# Altium PCB PCB_Analog_2021-08-04.pcbdoc
Units mil, origin at the board's own origin, x right, y up, seen from the top; angles counter-clockwise.
Board outline 5031.09 x 3931.04 mil, 2 copper layers (Top Layer, Bottom Layer); 71 components, 52 nets, 222 pads, 13 vias.
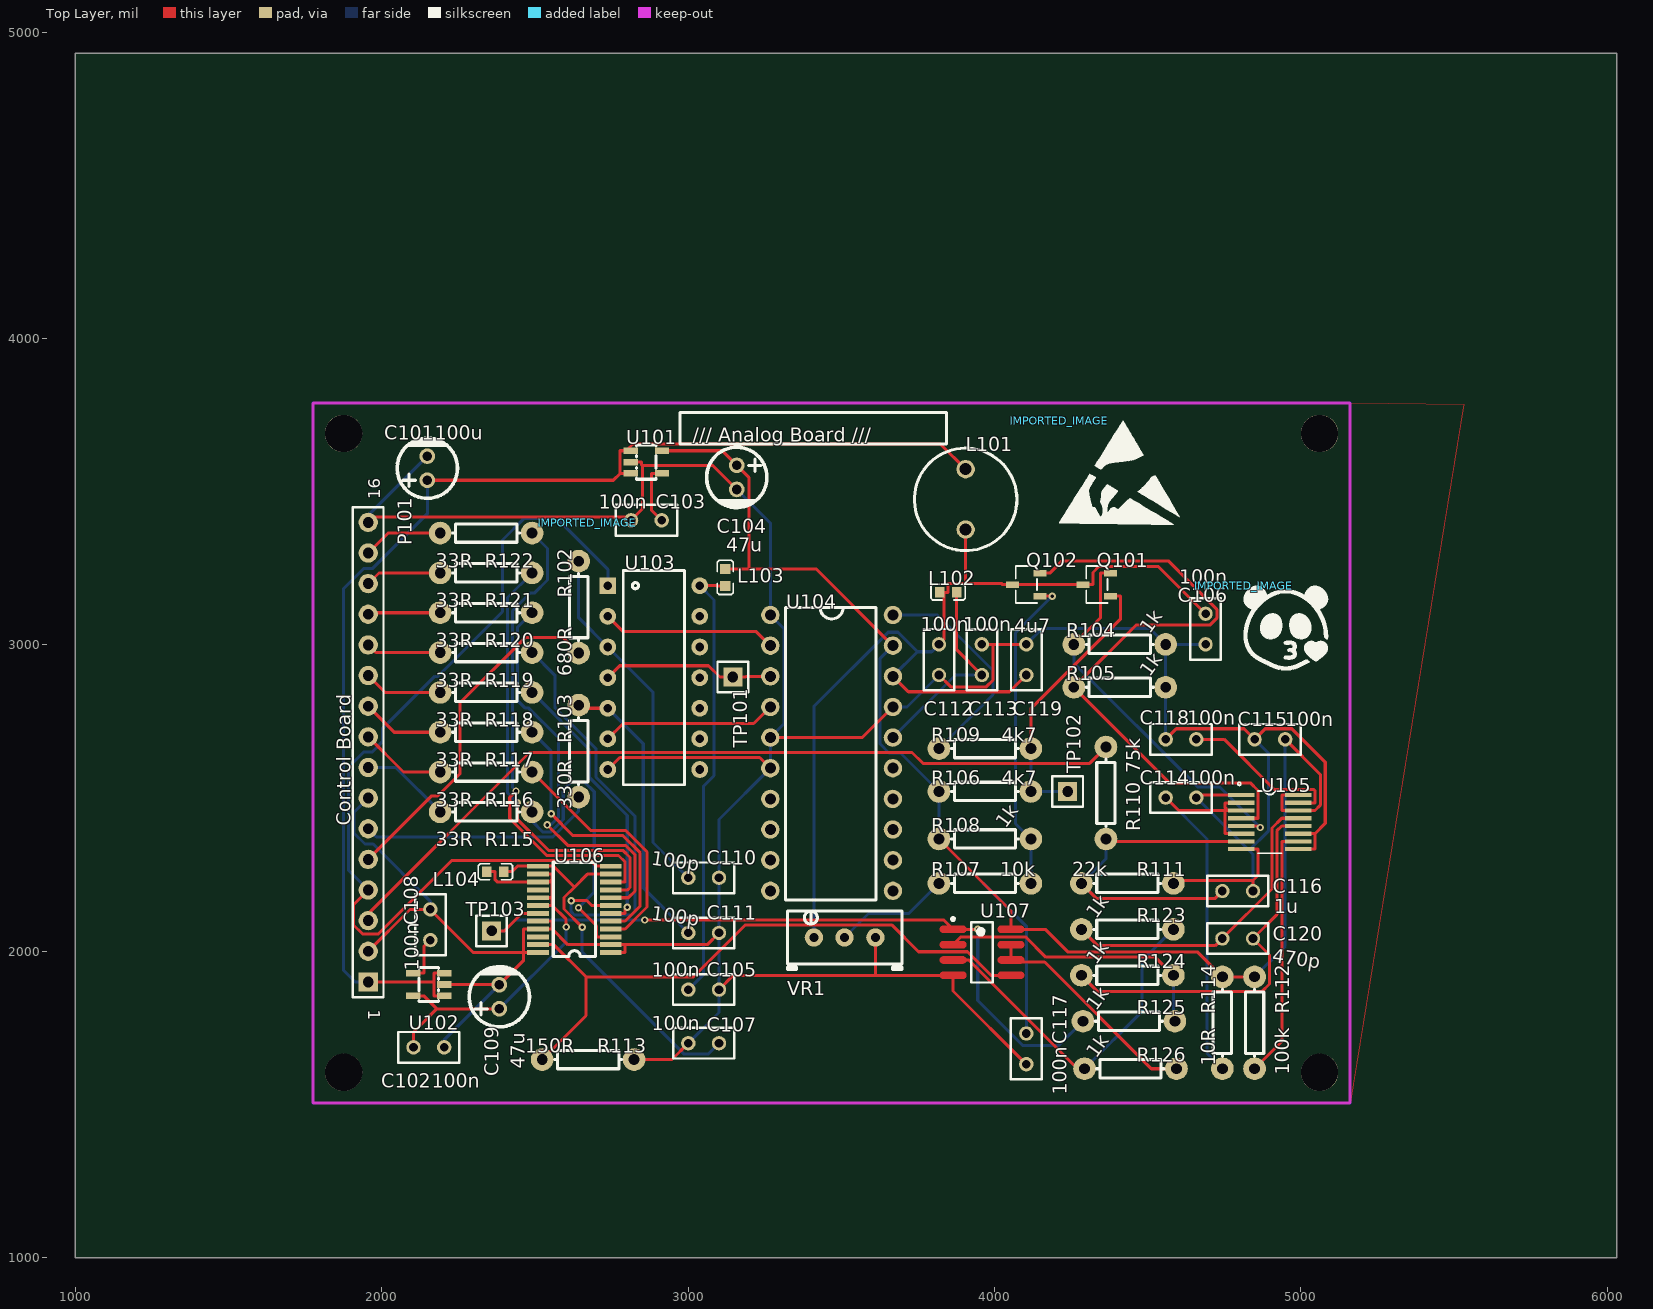
[diagram p0: Top Layer view]
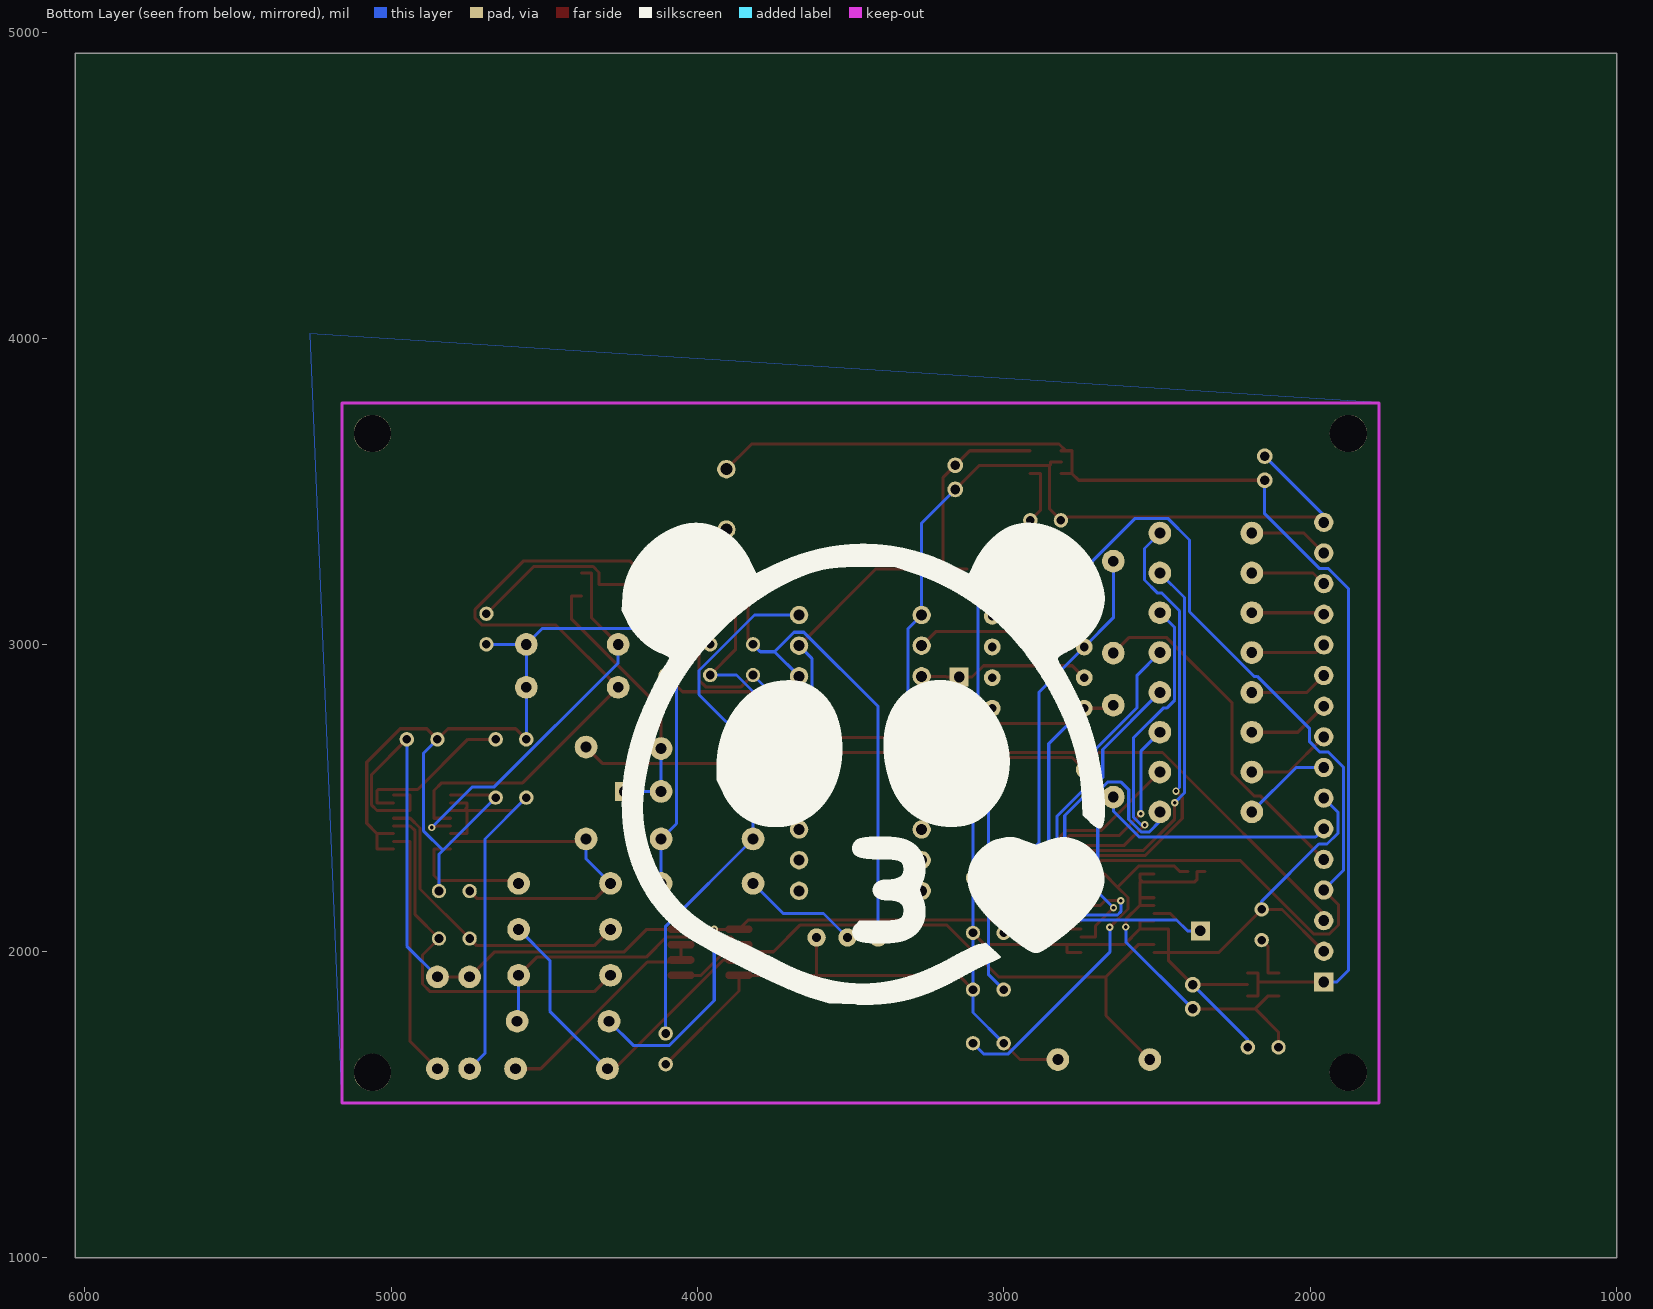
[diagram p1: Bottom Layer view, seen from below]

## Layer stack, top to bottom
Top Layer: signal copper (thickness not stored)
Dielectric: dielectric 12.6, FR-4, Dk 4.8
Bottom Layer: signal copper (thickness not stored)

## Board outline
6031.09,1000 1000,1000 1000,4931.04 6031.09,4931.04

## Components (designator, comment, footprint, x,y, rotation, side; value= is the part's Value field where it differs from the comment)
C101 "100u" CAP-TH_BD5.0-P2.00-D0.8-FD 2149,3576.73 r90 top
C102 "100n" RAD-0.1 2154,1686.73 r0 top
C103 "100n" RAD-0.1 2864,3406.73 r180 top
C104 "47u" CAP-TH_BD5.0-P2.00-D0.8-FD 3159,3546.73 r270 top
C105 "100n" RAD-0.1 3051.09,1875 r0 top
C106 "100n" RAD-0.1 4689,3051.73 r270 top
C107 "100n" RAD-0.1 3051.09,1700 r180 top
C108 "100n" RAD-0.1 2159,2086.73 r90 top
C109 "47u" CAP-TH_BD5.0-P2.00-D0.8-FD 2384,1851.73 r90 top
C110 "100p" RAD-0.1 3051.09,2240 r0 top
C111 "100p" RAD-0.1 3051.09,2060 r0 top
C112 "100n" RAD-0.1 3819,2951.73 r270 top
C113 "100n" RAD-0.1 3959,2951.73 r90 top
C114 "100n" RAD-0.1 4609,2501.73 r0 top
C115 "100n" RAD-0.1 4899,2691.73 r180 top
C116 "1u" RAD-0.1 4794,2196.73 r0 top
C117 "100n" RAD-0.1 4104,1681.73 r270 top
C118 "100n" RAD-0.1 4609,2691.73 r180 top
C119 "4u7" RAD-0.1 4104,2951.73 r90 top
C120 "470p" RAD-0.1 4794,2041.73 r180 top
IMPORTED_IMAGE "IMPORTED_IMAGE" IMPORTED_IMAGE 2670.99,3398.02 r0 top
IMPORTED_IMAGE "IMPORTED_IMAGE" IMPORTED_IMAGE 4813.3,3192.67 r0 top
IMPORTED_IMAGE "IMPORTED_IMAGE" IMPORTED_IMAGE 4211.4,3731.76 r0 top
L101 "100uH" IND-TH_BD8.5-P5.00-D0.6 3906.09,3475 r90 top
L102 "FB" L0603 3849,3171.73 r0 top
L103 "FB" L0603 3121.09,3220 r270 top
L104 "FB" L0603 2371.09,2260 r180 top
P101 "Control Board" HDR-TH_16P-P2.54-V 1956.09,2650 r90 top
Q101 "2SC2712" SOT-23-3_L2.9-W1.6-P1.90-LS2.8-BR 4334,3196.73 r0 top
Q102 "2SC2712" SOT-23-3_L2.9-W1.6-P1.90-LS2.8-BR 4104,3196.73 r0 top
R102 "680R" R_AXIAL-0.3 2643.17,3123.27 r270 top
R103 "330R" R_AXIAL-0.3 2643.17,2653.27 r270 top
R104 "1k" R_AXIAL-0.3 4409,3001.73 r0 top
R105 "1k" R_AXIAL-0.3 4409,2861.73 r0 top
R106 "4k7" R_AXIAL-0.3 3969,2521.73 r0 top
R107 "10k" R_AXIAL-0.3 3969,2221.73 r180 top
R108 "1k" R_AXIAL-0.3 3969,2366.73 r0 top
R109 "4k7" R_AXIAL-0.3 3969,2661.73 r0 top
R110 "75k" R_AXIAL-0.3 4364,2516.73 r270 top
R111 "22k" R_AXIAL-0.3 4434,2221.73 r0 top
R112 "100k" R_AXIAL-0.3 4849,1766.73 r270 top
R113 "150R" R_AXIAL-0.3 2674,1646.73 r0 top
R114 "10R" R_AXIAL-0.3 4744,1766.73 r270 top
R115 "33R" R_AXIAL-0.3 2341.09,2455 r180 top
R116 "33R" R_AXIAL-0.3 2341.09,2585 r180 top
R117 "33R" R_AXIAL-0.3 2341.09,2715 r180 top
R118 "33R" R_AXIAL-0.3 2341.09,2845 r180 top
R119 "33R" R_AXIAL-0.3 2341.09,2975 r180 top
R120 "33R" R_AXIAL-0.3 2341.09,3105 r180 top
R121 "33R" R_AXIAL-0.3 2341.09,3235 r180 top
R122 "33R" R_AXIAL-0.3 2341.09,3365 r180 top
R123 "1k" R_AXIAL-0.3 4434,2071.73 r0 top
R124 "1k" R_AXIAL-0.3 4434,1921.73 r0 top
R125 "1k" R_AXIAL-0.3 4439,1771.73 r180 top
R126 "1k" R_AXIAL-0.3 4444,1616.73 r0 top
TP101 "HDR-M-2.54_1x1" HDR-M-2.54_1X1 3146.09,2895 r0 top
TP102 "HDR-M-2.54_1x1" HDR-M-2.54_1X1 4239,2521.73 r0 top
TP103 "HDR-M-2.54_1x1" HDR-M-2.54_1X1 2359,2066.73 r0 top
U101 "TAR5SB50" SOT23-5 2864,3596.73 r270 top
U102 "TAR5SB33" SOT23-5 2154,1891.73 r90 top
U103 "SN74AHCT04N" DIP14 2888.17,2893.27 r270 top
U104 "TCD132D" WDIP20-G-400(B) 3468.61,2647.52 r0 top
U105 "AD8330ARQ" AD8330-RQ_16 4899,2421.73 r0 top
U106 "ADC1173CIMTC" TSSOP-24 2629,2136.73 r180 top
U107 "AD8656" ADI-R-8_N 4054,1921.73 r0 top
VR1 "10k" RES-ADJ-TH_3296W 3511.09,2045 r90 top
? "" ? 1826.1,3934.07 r0 top
? "" ? 3468.59,3871.27 r0 top
? "" ? 1698.74,2647.5 r0 top
? "" ? 1866.1,3714.52 r0 top
? "" ? 3468.65,3081.58 r0 top

## Footprints (in the part's own frame and the unit in brackets; to place one, negate y for a bottom-side part, rotate by r counter-clockwise, add the part's x,y. Pads: shape width x height; smd on the part's side, far side on the other; paste and mask are expansions set on the pad)
AD8330-RQ_16 [mil]
  rect 86.07x13.81 smd: 1(-93.01,88.19) 2(-93.01,62.99) 3(-93.01,37.8) 4(-93.01,12.6) 5(-93.01,-12.6) 6(-93.01,-37.8) 7(-93.01,-62.99) 8(-93.01,-88.19) 9(93.01,-88.19) 10(93.01,-62.99) 11(93.01,-37.8) 12(93.01,-12.6) 13(93.01,12.6) 14(93.01,37.8) 15(93.01,62.99) 16(93.01,88.19)
  silkscreen extent -105,-101 39,130
ADI-R-8_N [mil]
  round 0 smd: 1(-188.98,150) 2(-188.98,100) 3(-188.98,50) 4(-188.98,0) 5(0,0) 6(0,50) 7(0,100) 8(0,150)
  Top Layer region: 31.5,11.81 32.98,11.72 34.43,11.44 35.84,10.98 37.19,10.35 38.44,9.56 39.58,8.61 40.6,7.53 41.47,6.33 42.18,5.03 42.73,3.65 43.1,2.21 43.28,0.74 43.28,-0.74 43.1,-2.21 42.73,-3.65 42.18,-5.03 41.47,-6.33 40.6,-7.53 39.58,-8.61 38.44,-9.56 37.19,-10.35 35.84,-10.98 34.43,-11.44 32.98,-11.72 31.5,-11.81 -31.5,-11.81 -32.98,-11.72 -34.43,-11.44 -35.84,-10.98 -37.19,-10.35 -38.44,-9.56 -39.58,-8.61 -40.6,-7.53 -41.47,-6.33 -42.18,-5.03 -42.73,-3.65 -43.1,-2.21 -43.28,-0.74 -43.28,0.74 -43.1,2.21 -42.73,3.65 -42.18,5.03 -41.47,6.33 -40.6,7.53 -39.58,8.61 -38.44,9.56 -37.19,10.35 -35.84,10.98 -34.43,11.44 -32.98,11.72 -31.5,11.81
  Top Layer region: 31.5,61.81 32.98,61.72 34.43,61.44 35.84,60.98 37.19,60.35 38.44,59.56 39.58,58.61 40.6,57.53 41.47,56.33 42.18,55.03 42.73,53.65 43.1,52.21 43.28,50.74 43.28,49.26 43.1,47.79 42.73,46.35 42.18,44.97 41.47,43.67 40.6,42.47 39.58,41.39 38.44,40.44 37.19,39.65 35.84,39.02 34.43,38.56 32.98,38.28 31.5,38.19 -31.5,38.19 -32.98,38.28 -34.43,38.56 -35.84,39.02 -37.19,39.65 -38.44,40.44 -39.58,41.39 -40.6,42.47 -41.47,43.67 -42.18,44.97 -42.73,46.35 -43.1,47.79 -43.28,49.26 -43.28,50.74 -43.1,52.21 -42.73,53.65 -42.18,55.03 -41.47,56.33 -40.6,57.53 -39.58,58.61 -38.44,59.56 -37.19,60.35 -35.84,60.98 -34.43,61.44 -32.98,61.72 -31.5,61.81
  Top Layer region: 31.5,111.81 32.98,111.72 34.43,111.44 35.84,110.98 37.19,110.35 38.44,109.56 39.58,108.61 40.6,107.53 41.47,106.33 42.18,105.03 42.73,103.65 43.1,102.21 43.28,100.74 43.28,99.26 43.1,97.79 42.73,96.35 42.18,94.97 41.47,93.67 40.6,92.47 39.58,91.39 38.44,90.44 37.19,89.65 35.84,89.02 34.43,88.56 32.98,88.28 31.5,88.19 -31.5,88.19 -32.98,88.28 -34.43,88.56 -35.84,89.02 -37.19,89.65 -38.44,90.44 -39.58,91.39 -40.6,92.47 -41.47,93.67 -42.18,94.97 -42.73,96.35 -43.1,97.79 -43.28,99.26 -43.28,100.74 -43.1,102.21 -42.73,103.65 -42.18,105.03 -41.47,106.33 -40.6,107.53 -39.58,108.61 -38.44,109.56 -37.19,110.35 -35.84,110.98 -34.43,111.44 -32.98,111.72 -31.5,111.81
  Top Layer region: 31.5,161.81 32.98,161.72 34.43,161.44 35.84,160.98 37.19,160.35 38.44,159.56 39.58,158.61 40.6,157.53 41.47,156.33 42.18,155.03 42.73,153.65 43.1,152.21 43.28,150.74 43.28,149.26 43.1,147.79 42.73,146.35 42.18,144.97 41.47,143.67 40.6,142.47 39.58,141.39 38.44,140.44 37.19,139.65 35.84,139.02 34.43,138.56 32.98,138.28 31.5,138.19 -31.5,138.19 -32.98,138.28 -34.43,138.56 -35.84,139.02 -37.19,139.65 -38.44,140.44 -39.58,141.39 -40.6,142.47 -41.47,143.67 -42.18,144.97 -42.73,146.35 -43.1,147.79 -43.28,149.26 -43.28,150.74 -43.1,152.21 -42.73,153.65 -42.18,155.03 -41.47,156.33 -40.6,157.53 -39.58,158.61 -38.44,159.56 -37.19,160.35 -35.84,160.98 -34.43,161.44 -32.98,161.72 -31.5,161.81
  Top Layer region: -157.48,11.81 -156,11.72 -154.54,11.44 -153.13,10.98 -151.79,10.35 -150.54,9.56 -149.4,8.61 -148.38,7.53 -147.51,6.33 -146.79,5.03 -146.25,3.65 -145.88,2.21 -145.69,0.74 -145.69,-0.74 -145.88,-2.21 -146.25,-3.65 -146.79,-5.03 -147.51,-6.33 -148.38,-7.53 -149.4,-8.61 -150.54,-9.56 -151.79,-10.35 -153.13,-10.98 -154.54,-11.44 -156,-11.72 -157.48,-11.81 -220.47,-11.81 -221.95,-11.72 -223.41,-11.44 -224.82,-10.98 -226.16,-10.35 -227.41,-9.56 -228.56,-8.61 -229.57,-7.53 -230.44,-6.33 -231.16,-5.03 -231.71,-3.65 -232.07,-2.21 -232.26,-0.74 -232.26,0.74 -232.07,2.21 -231.71,3.65 -231.16,5.03 -230.44,6.33 -229.57,7.53 -228.56,8.61 -227.41,9.56 -226.16,10.35 -224.82,10.98 -223.41,11.44 -221.95,11.72 -220.47,11.81
  Top Layer region: -157.48,61.81 -156,61.72 -154.54,61.44 -153.13,60.98 -151.79,60.35 -150.54,59.56 -149.4,58.61 -148.38,57.53 -147.51,56.33 -146.79,55.03 -146.25,53.65 -145.88,52.21 -145.69,50.74 -145.69,49.26 -145.88,47.79 -146.25,46.35 -146.79,44.97 -147.51,43.67 -148.38,42.47 -149.4,41.39 -150.54,40.44 -151.79,39.65 -153.13,39.02 -154.54,38.56 -156,38.28 -157.48,38.19 -220.47,38.19 -221.95,38.28 -223.41,38.56 -224.82,39.02 -226.16,39.65 -227.41,40.44 -228.56,41.39 -229.57,42.47 -230.44,43.67 -231.16,44.97 -231.71,46.35 -232.07,47.79 -232.26,49.26 -232.26,50.74 -232.07,52.21 -231.71,53.65 -231.16,55.03 -230.44,56.33 -229.57,57.53 -228.56,58.61 -227.41,59.56 -226.16,60.35 -224.82,60.98 -223.41,61.44 -221.95,61.72 -220.47,61.81
  Top Layer region: -157.48,111.81 -156,111.72 -154.54,111.44 -153.13,110.98 -151.79,110.35 -150.54,109.56 -149.4,108.61 -148.38,107.53 -147.51,106.33 -146.79,105.03 -146.25,103.65 -145.88,102.21 -145.69,100.74 -145.69,99.26 -145.88,97.79 -146.25,96.35 -146.79,94.97 -147.51,93.67 -148.38,92.47 -149.4,91.39 -150.54,90.44 -151.79,89.65 -153.13,89.02 -154.54,88.56 -156,88.28 -157.48,88.19 -220.47,88.19 -221.95,88.28 -223.41,88.56 -224.82,89.02 -226.16,89.65 -227.41,90.44 -228.56,91.39 -229.57,92.47 -230.44,93.67 -231.16,94.97 -231.71,96.35 -232.07,97.79 -232.26,99.26 -232.26,100.74 -232.07,102.21 -231.71,103.65 -231.16,105.03 -230.44,106.33 -229.57,107.53 -228.56,108.61 -227.41,109.56 -226.16,110.35 -224.82,110.98 -223.41,111.44 -221.95,111.72 -220.47,111.81
  Top Layer region: -157.48,161.81 -156,161.72 -154.54,161.44 -153.13,160.98 -151.79,160.35 -150.54,159.56 -149.4,158.61 -148.38,157.53 -147.51,156.33 -146.79,155.03 -146.25,153.65 -145.88,152.21 -145.69,150.74 -145.69,149.26 -145.88,147.79 -146.25,146.35 -146.79,144.97 -147.51,143.67 -148.38,142.47 -149.4,141.39 -150.54,140.44 -151.79,139.65 -153.13,139.02 -154.54,138.56 -156,138.28 -157.48,138.19 -220.47,138.19 -221.95,138.28 -223.41,138.56 -224.82,139.02 -226.16,139.65 -227.41,140.44 -228.56,141.39 -229.57,142.47 -230.44,143.67 -231.16,144.97 -231.71,146.35 -232.07,147.79 -232.26,149.26 -232.26,150.74 -232.07,152.21 -231.71,153.65 -231.16,155.03 -230.44,156.33 -229.57,157.53 -228.56,158.61 -227.41,159.56 -226.16,160.35 -224.82,160.98 -223.41,161.44 -221.95,161.72 -220.47,161.81
  silkscreen extent -194,-23 -59,188
CAP-TH_BD5.0-P2.00-D0.8-FD [mm]
  round 1.3 hole 0.8: 1(-1,0) 2(1,0)
  silkscreen extent -2.5,-2.5 2.5,2.5
DIP14 [mil]
  rect 55x55 hole 28: 1(-300,-150)
  round 55 hole 28: 2(-200,-150) 3(-100,-150) 4(0,-150) 5(100,-150) 6(200,-150) 7(300,-150) 8(300,150) 9(200,150) 10(100,150) 11(0,150) 12(-100,150) 13(-200,150) 14(-300,150)
  silkscreen extent -350,-100 350,100
HDR-M-2.54_1X1 [mil]
  rect 62x62 hole 35: 1(0,0)
  silkscreen extent -50,-50 50,50
HDR-TH_16P-P2.54-V [mm]
  rect 1.6x1.6 hole 0.9: 1(-19.05,0)
  round 1.6 hole 0.9: 2(-16.51,0) 3(-13.97,0) 4(-11.43,0) 5(-8.89,0) 6(-6.35,0) 7(-3.81,0) 8(-1.27,0) 9(1.27,0) 10(3.81,0) 11(6.35,0) 12(8.89,0) 13(11.43,0) 14(13.97,0) 15(16.51,0) 16(19.05,0)
  silkscreen extent -20.32,-1.27 20.32,1.27
IMPORTED_IMAGE [mil]
IND-TH_BD8.5-P5.00-D0.6 [mil]
  round 60 hole 39.37: 1(-98.43,0) 2(98.42,0)
  silkscreen extent -167,-167 167,167
L0603 [mm]
  rect 0.8x0.864 smd: 1(0.7,0) 2(-0.7,0)
  silkscreen extent -1.42,-0.65 1.41,0.67
R_AXIAL-0.3 [mil]
  round 74 hole 35.4: 1(-150,0) 2(150,0)
  silkscreen extent -110,-30 110,30
RAD-0.1 [mil]
  round 47 hole 28: 1(-50,0) 2(50,0)
  silkscreen extent -100,-50 100,50
RES-ADJ-TH_3296W [mil]
  round 60 hole 30: 1(0,100.39) 2(0,0.39) 3(0,-100.39)
  silkscreen extent -104,-187 87,187
SOT23-5 [mil]
  rect 21.7x47.2 smd: 1(-37,-51) 2(0,-51) 3(37,-51) 4(37,51) 5(-37,51)
  silkscreen extent -56,-32 56,32
SOT-23-3_L2.9-W1.6-P1.90-LS2.8-BR [mm]
  rect 1.07x0.532 smd: 1(1.135,-0.95) 2(1.135,0.95) 3(-1.135,0)
  silkscreen extent -0.88,-1.54 0.88,1.54
TSSOP-24 [mil]
  rect 71x16 smd: 1(-119,141) 2(-119,115) 3(-119,90) 4(-119,64) 5(-119,38) 6(-119,13) 7(-119,-13) 8(-119,-38) 9(-119,-64) 10(-119,-90) 11(-119,-115) 12(-119,-141) 13(119,-141) 14(119,-115) 15(119,-90) 16(119,-64) 17(119,-38) 18(119,-13) 19(119,13) 20(119,38) 21(119,64) 22(119,90) 23(119,115) 24(119,141)
  silkscreen extent -69,-154 69,153
WDIP20-G-400(B) [mil]
  round 60 hole 36: 1(-200,450) 2(-200,350) 3(-200,250) 4(-200,150) 5(-200,50) 6(-200,-50) 7(-200,-150) 8(-200,-250) 9(-200,-350) 10(-200,-450) 11(200,-450) 12(200,-350) 13(200,-250) 14(200,-150) 15(200,-50) 16(200,50) 17(200,150) 18(200,250) 19(200,350) 20(200,450)
  silkscreen extent -150,-480 145,475
? [mil]

## Free pads (board coordinates)
  round 122.05 hole 122.05 unplated: ""(1876.09,1605) ""(1876.09,3690) ""(5061.09,1605) ""(5061.09,3690)

## Via types
v1: diameter 24.02, hole 12.01, Top Layer to Bottom Layer, 13 vias

## Nets (pads, with @x,y where several pads share a name; then routed paths per layer and width w, separated by ;. In a path a pad name is that pad's centre, name@x,y a point inside that pad or via, vN(x,y) a via of type N, cw(c..) or ccw(c..) an arc to the next point about the centre after c; other vN are vias at no path point)
+5V: C104.1 C115.1 C117.1 L103.2 R106.1 R108.1 R112.1 R114.1 U101.5 U104.19 U105.14 U105.16 U107.8 | length 5339.6
  Top Layer w10: U101.5 3111.37,3633.73 C104.1 3198.4,3546.7 3198.4,3247.56 ; L103.2 3198.4,3247.56 ; U104.19 3418.57,3247.56 3198.4,3247.56 ; R108.1 4054,2131.73 U107.8 4165.86,2071.73 4240.46,1997.13 4663.6,1997.13 R114.1 R112.1 ; C115.1 5063.66,2577.07 5063.66,2477.07 5046.12,2459.53 U105.14 4964.96,2459.53 4937.91,2459.53 4937.91,2509.92 U105.16
  Bottom Layer w10: U104.19 3627.09,2956 3627.09,2676.51 3656.08,2647.52 3693.21,2647.52 R106.1 R108.1 4104,2081.73 C117.1 ; R112.1 4949,2016.73 C115.1
C113_1: C113.1 L102.1 U104.16 | length 679.1
  Top Layer w10: L102.1 3876.56,2984.17 C113.1
  Bottom Layer w10: U104.16 3872.82,2901.73 C113.1
GND: C101.2 C102.2 C103.2 C104.2 C105.2 C106.2 C107.2 C108.2 C109.2 C110.2 C111.2 C112.2 C113.2 C114.2 C115.2 C116.2 C117.2 C118.2 C119.2 P101.2 P101.7 P101.16 R104.2 R105.2 R111.2 R113.2 U101.2 U102.2 U103.7 U104.1 U104.5 U104.6 U104.17 U105.1 U105.8 U105.9 U105.11 U106.1 U106.2 U106.20 U106.21 U106.24 U107.4 VR1.3 | length 12918
  Top Layer w10: P101.2 2092.82,2136.73 C108.2 2300,1995.73 2463.43,1995.73 ; P101.16 1973.61,3417.52 2803.21,3417.52 C103.2 2850.71,3443.44 2850.71,3585.56 ; U102.2 2239.67,1891.73 2240.3,1891.1 C109.2 2463.43,1970.53 2463.43,1995.73 ; U106.24 2463.43,1995.73 ; U106.20 2556.57,2098.73 2556.57,2072.73 ; U103.7 2777.46,2632.55 3233.58,2632.55 U104.6 ; U106.1 2794.57,1995.73 2794.57,2021.73 ; U101.2 2847.67,3596.73 2847.67,3588.6 2850.71,3585.56 ; R113.2 2947.82,1646.73 C107.2 ; C105.2 3147.82,1921.73 3611.49,1921.73 ; C111.2 3062.82,2021.73 2794.57,2021.73 ; C104.2 3080.8,3585.56 2850.71,3585.56 ; U104.5 3568.61,2697.52 U104.17 ; VR1.3 3611.49,1921.73 ; C112.2 3857.59,2863.14 3973.46,2863.14 3995.22,2884.9 3995.22,3001.73 ; C113.2 3995.22,3001.73 ; C117.2 3865.02,1870.71 U107.4 3611.49,1921.73 ; C119.2 3995.22,3001.73 ; C118.2 4593.58,2726.31 4814.42,2726.31 C115.2 4883.58,2726.31 4970.5,2726.31 5079.76,2617.05 5079.76,2417.57 5046.12,2383.93 ; R111.2 4593.58,2231.31 4844,2231.31 ; C114.2 4667.19,2509.92 U105.1 ; U105.8 4860.1,2333.54 4860.1,2247.41 4844,2231.31 ; C116.2 4844,2231.31 ; U105.9 5046.12,2333.54 5046.12,2383.93 ; U105.11 5042.1,2383.93 5046.12,2383.93 ; 2463.43,1995.73 2463.43,2072.73 U106.21 2529.26,2072.73 2556.57,2072.73 ; 2556.57,2072.73 2607.57,2021.73 U106.2 2771.29,2021.73 2794.57,2021.73
  Bottom Layer w10: P101.7 1910.08,2453.99 1910.08,2385.36 1945.44,2350 1972.2,2350 2159,2163.2 C108.2 ; P101.16 1956.09,3423.19 C101.2 ; C102.2 2204,1711.1 C109.2 ; C107.2 3101.09,1800 C105.2 C111.2 C110.2 3101.09,2430 U104.6 U104.5 3312.8,2741.71 3312.8,3053.33 U104.1 3268.61,3397.75 C104.2 ; U104.17 3714.79,2797.52 C112.2 ; C119.2 4155.88,3053.61 4507.12,3053.61 R104.2 ; C118.2 R105.2 R104.2 ; C114.2 4830.99,2329.75 ; C106.2 R104.2 ; C116.2 4844,2316.73 4830.99,2329.75 ; C115.2 4895.16,2645.57 4895.16,2393.92 4830.99,2329.75
L101_1: C106.1 C112.1 C119.1 L101.1 L102.2 Q101.3 Q102.3 U104.18 VR1.1 | length 3252.3
  Top Layer w10: U104.18 3719.08,2847.05 4049.32,2847.05 C119.1 ; C112.1 3834.85,3017.58 L102.2@3834.85,3171.73 ; L102.2 L102.2@3834.85,3171.73 ; L101.1 3906.09,3199.82 ; C106.1 4535.06,3255.67 4340.66,3255.67 4321.45,3236.46 4321.45,3196.73 Q101.3 Q102.3 4027.18,3196.73 4024.09,3199.82 3906.09,3199.82 ; L102.2@3834.85,3171.73 3848.26,3171.73 3848.26,3198.55 3849.53,3199.82 3906.09,3199.82
  Bottom Layer w10: VR1.1 3410.7,2798.82 3653.28,3041.4 3685.16,3041.4 3748.83,2977.74 ; U104.18 3748.83,2977.74 ; C112.1 3795,2977.73 3748.83,2977.73
P101_1: C101.1 L101.2 P101.1 U101.1 U101.3 U102.1 U102.3 | length 4116.1
  Top Layer w10: P101.1 2170.33,1900 ; C101.1 2755.96,3537.36 2778.33,3559.73 ; U102.1 2170.33,1854.73 2170.33,1900 ; U102.3 2170.33,1928.73 2170.33,1900 ; U101.3 2782.36,3559.73 2778.33,3559.73 ; U101.1 U101.1@2798.2,3633.73 ; L101.2 3823.59,3655.92 2820.39,3655.92 U101.1@2798.2,3633.73 ; 2778.33,3559.73 2778.33,3633.73 2795.67,3633.73 U101.1@2798.2,3633.73
  Bottom Layer w10: P101.1 1913.52,1900 1876.02,1937.5 1876.02,3183.81 1942.21,3250 1970.92,3250 2149,3428.08 C101.1
P101_3: P101.3 R110.1 | length 2685.4
  Top Layer w10: P101.3 1956.09,2122.68 2482.38,2648.97 3731.22,2648.97 3766.73,2613.46 4310.73,2613.46 R110.1
P101_4: P101.4 U103.1 U106.12 | length 2986.7
  Top Layer w10: P101.4 1908.32,2152.23 1908.32,2086 1937.29,2057.03 1989.91,2057.03 2229.68,2296.8 2682.36,2296.8 2701.43,2277.73 U106.12
  Bottom Layer w10: P101.4 1892.42,2263.67 1892.42,2601.41 1941.01,2650 1968.53,2650 2002.46,2683.93 2002.46,2726.38 2173.59,2897.51 2183.78,2897.51 2394.74,3108.47 2394.74,3342.57 2465.24,3413.07 2571.68,3413.07 2738.18,3246.57 U103.1
P101_5: P101.5 R102.2 | length 1143.8
  Top Layer w10: P101.5 2163.47,2507.38 2183.95,2507.38 2255.75,2579.18 2255.75,2811.31 2468.29,3023.85 2592.6,3023.85 R102.2
P101_6: P101.6 R103.2 | length 778.6
  Bottom Layer w10: P101.6 1982.75,2373.34 2558.77,2373.34 2643.18,2457.75 R103.2
P101_8: P101.8 R115.2 | length 295.1
  Bottom Layer w10: P101.8 2046.09,2600 R115.2
P101_9: P101.9 R116.2 | length 282.6
  Top Layer w10: P101.9 2071.09,2585 R116.2
P101_10: P101.10 R117.2 | length 270.2
  Top Layer w10: P101.10 2041.09,2715 R117.2
P101_11: P101.11 R118.2 | length 257.8
  Top Layer w10: P101.11 2011.09,2845 R118.2
P101_12: P101.12 R119.2 | length 245.4
  Top Layer w10: P101.12 1981.09,2975 R119.2
P101_13: P101.13 R120.2 | length 237.1
  Top Layer w10: P101.13 1961.09,3105 R120.2
P101_14: P101.14 R121.2 | length 249.5
  Top Layer w10: P101.14 1991.09,3235 R121.2
P101_15: P101.15 R122.2 | length 261.9
  Top Layer w10: P101.15 2021.09,3365 R122.2
Q102_1: Q102.1 R107.1 R108.2 | length 1048.1
  Top Layer w10: Q102.1 4180.82,3159.33 v1(4188.89,3159.33)
  Bottom Layer w10: R107.1 R108.2 4069.04,2416.69 4069.04,3039.48 v1(4188.89,3159.33)
R106_2: Q101.1 R106.2 R109.2 TP102.1 | length 910.6
  Top Layer w10: R109.2 4119,2791.71 4410.82,3083.53 4410.82,3159.33 Q101.1
  Bottom Layer w10: R109.2 R106.2 TP102.1
R107_2: R107.2 VR1.2 | length 381.5
  Bottom Layer w10: VR1.2 3589.08,2123.38 3720.65,2123.38 R107.2
R109_1: R109.1 U104.20 | length 729.3
  Bottom Layer w10: U104.20 3814.3,3097.52 3995.09,2916.73 3995.09,2837.82 R109.1
U101_4: C103.1 U101.4 | length 201.6
  Top Layer w10: C103.1 2880.33,3440.4 2880.33,3559.73 U101.4
U102_4: C108.1 U102.4 | length 151.5
  Top Layer w10: U102.4 2137.67,1928.73 2137.67,2015.4 C108.1
U103_2: U103.2 U104.2 | length 570.1
  Top Layer w10: U103.2 2788.18,3043.27 3222.86,3043.27 U104.2
U103_3: C110.1 R102.1 U103.3 | length 1181.5
  Bottom Layer w10: R102.1 2643.18,3088.27 U103.3 2885.91,2845.54 2885.91,2355.18 C110.1
U103_4: TP101.1 U103.4 U104.3 | length 562.8
  Top Layer w10: U103.4 2776.87,2931.96 3067.06,2931.96 3104.02,2895 TP101.1 3188.16,2895 3190.68,2897.52 U104.3
U103_5: C111.1 R103.1 U103.5 | length 941.3
  Top Layer w10: R103.1 2653.18,2793.27 U103.5
  Bottom Layer w10: U103.5 2853.75,2677.7 2853.75,2207.34 C111.1
U103_6: U103.6 U104.4 | length 573.6
  Top Layer w10: U103.6 2788.18,2743.27 3214.36,2743.27 U104.4
U103_14: C105.1 L103.1 U103.14 | length 1455.7
  Top Layer w10: U103.14 3092.18,3193.27 3093.01,3192.44 L103.1
  Bottom Layer w10: C105.1 3051.1,1925.01 3051.1,2539.28 3084.99,2573.17 3084.99,3146.46 U103.14
U105_4: Q102.2 R105.1 U105.4 | length 2133.4
  Top Layer w10: Q102.2 4180.82,3234.13 4221.1,3274.41 4567.43,3274.41 4725.73,3116.11 4725.73,3087.36 4702.86,3064.49 4461.76,3064.49 R105.1 4570.81,2549.92 4834.89,2549.92 4860.1,2524.71 4860.1,2434.33 U105.4
U105_5: Q101.2 R104.1 U105.5 | length 1255.6
  Top Layer w10: R104.1 4346.55,3089.28 4346.55,3234.13 Q101.2 ; U105.5 4860.1,2409.13 4865.25,2403.98 v1(4867.28,2403.98)
  Bottom Layer w10: R104.1 4259,2941.08 4663.18,2536.9 4734.36,2536.9 v1(4867.28,2403.98)
U105_6: C114.1 R114.2 U105.2 U105.3 U105.6 | length 1439.3
  Top Layer w10: C114.1 4601.2,2459.53 4751.89,2459.53 ; U105.6 4751.89,2383.93 4751.89,2459.53 ; U105.3 4780.8,2459.53 4762.04,2459.53 ; U105.2 4751.89,2484.72 4751.89,2469.68 4762.04,2459.53 ; 4751.89,2459.53 4762.04,2459.53
  Bottom Layer w10: C114.1 4693.93,2366.8 4693.93,1666.8 R114.2
U105_7: C116.1 R110.2 R111.1 U105.7 | length 1114.5
  Top Layer w10: R111.1 4334,2171.73 4719,2171.73 C116.1 ; R110.2 4371.99,2358.74 U105.7
  Bottom Layer w10: R111.1 4364,2301.73 R110.2
U105_10: R112.2 U105.10 | length 832.9
  Top Layer w10: R112.2 4937.91,1705.64 4937.91,2358.74 U105.10
U105_12: C120.1 R124.1 U105.12 | length 1277.2
  Top Layer w10: R124.1 4337.56,1868.17 4872.36,1868.17 4897.64,1893.45 4897.64,1988.09 C120.1 4921.82,2119.55 4921.82,2393.04 4937.91,2409.13 U105.12
U105_13: C120.2 R123.1 U105.13 | length 1018.9
  Top Layer w10: R123.1 4337.43,2018.3 4720.57,2018.3 C120.2 4905.73,2203.46 4905.73,2402.15 4937.91,2434.33 U105.13
U105_15: C118.1 U105.15 | length 550.6
  Top Layer w10: C118.1 4749.9,2691.73 4913.72,2527.91 5043.2,2527.91 5046.12,2524.99 5046.12,2484.72 U105.15
U106_3: R115.1 U106.3 | length 951.7
  Top Layer w10: v1(2642.38,2142.12) 2701.43,2083.07 2701.43,2046.73 U106.3
  Bottom Layer w10: R115.1 2491.09,2424.14 2525.8,2389.43 2552.1,2389.43 2592.65,2429.98 2592.65,2527.28 2617.52,2552.15 2662.37,2552.15 2693.79,2520.73 2693.79,2193.53 v1(2642.38,2142.12)
U106_4: R116.1 U106.4 | length 811.3
  Top Layer w10: R116.1 2682.1,2393.99 2797.06,2393.99 2866.23,2324.82 2866.23,2144.39 2794.57,2072.73 U106.4
U106_5: R117.1 U106.5 | length 924.9
  Top Layer w10: v1(2553.28,2448.44) 2623.82,2377.9 2787.16,2377.9 2843.71,2321.35 2843.71,2147.87 2794.57,2098.73 U106.5
  Bottom Layer w10: R117.1 2553.28,2652.81 v1(2553.28,2448.44)
U106_6: R118.1 U106.6 | length 899.4
  Top Layer w10: U106.6 2794.57,2123.73 2794.57,2136.18 v1(2801.66,2143.27)
  Bottom Layer w10: R118.1 2677.52,2658.57 2677.52,2567.57 2801.66,2443.43 v1(2801.66,2143.27)
U106_7: R119.1 U106.7 | length 1374.2
  Top Layer w10: v1(2618.47,2165.21) 2670.06,2165.21 2685.54,2149.73 U106.7
  Bottom Layer w10: R119.1 2566.26,2899.83 2566.26,2794.34 2699.6,2661 2699.6,2568.25 2826.85,2441 2826.85,2129.14 2816.05,2118.34 2629.48,2118.34 2618.47,2129.35 v1(2618.47,2165.21)
U106_8: R120.1 U106.8 | length 1328.6
  Top Layer w10: v1(2540.85,2412.51) 2607.49,2345.87 2795.94,2345.87 2826.75,2315.06 2826.75,2196.47 2805.01,2174.73 U106.8
  Bottom Layer w10: R120.1 2443.01,3056.92 2443.01,2819.65 2469.11,2793.55 2480.54,2793.55 2576.54,2697.55 2576.54,2436.63 2552.42,2412.51 v1(2540.85,2412.51)
U106_9: R121.1 U106.9 | length 1433.3
  Top Layer w10: v1(2443.01,2484.81) 2443.01,2431.38 2544.76,2329.63 2787.2,2329.63 2810.66,2306.17 2810.66,2208.37 2803.02,2200.73 U106.9
  Bottom Layer w10: v1(2443.01,2484.81) 2410.83,2516.99 2410.83,3154.74 R121.1
U106_10: R122.1 U106.10 | length 1568.1
  Top Layer w10: v1(2438.67,2522.92) 2418.14,2502.39 2418.14,2433.48 2538.72,2312.9 2773,2312.9 2794.57,2291.33 2794.57,2226.73 U106.10
  Bottom Layer w10: v1(2438.67,2522.92) 2426.92,2534.67 2426.92,3111.37 2485.55,3170 2499.87,3170 2541.53,3211.66 2541.53,3314.56 R122.1
U106_11: C107.1 L104.2 U106.11 U106.13 | length 1252.7
  Top Layer w10: L104.2 2425.47,2260 2443.2,2277.73 U106.13 2560.82,2277.73 2629.17,2209.39 ; v1(2654.5,2078.81) 2595.38,2137.93 2595.38,2175.6 2629.17,2209.39 ; U106.11 2671.51,2251.73 2629.17,2209.39
  Bottom Layer w10: v1(2654.5,2078.81) 2654.5,1997.06 2987.4,1664.16 3065.25,1664.16 C107.1
U106_14: C102.1 C109.1 L104.1 U102.5 U106.14 U106.15 U106.17 U106.18 | length 1390.1
  Top Layer w10: U102.5 2137.67,1854.73 2180.04,1812.36 ; C102.1 2104,1736.32 2180.04,1812.36 ; L104.1 2370.35,2260 2370.35,2233.18 2376.8,2226.73 U106.15 2521.65,2226.73 2533.29,2226.73 2547.71,2226.73 ; C109.1 2180.04,1812.36 ; U106.18 2556.57,2149.73 ; U106.17 2552.55,2174.73 2555.72,2174.73 ; U106.14 2556.57,2251.73 2556.57,2235.59 2547.71,2226.73 ; v1(2602.18,2079.16) 2602.18,2104.12 2556.57,2149.73 ; 2547.71,2226.73 2556.57,2226.73 2556.57,2175.58 2555.72,2174.73 ; 2555.72,2174.73 2556.57,2173.88 2556.57,2149.73
  Bottom Layer w10: C109.1 2602.18,2030.54 v1(2602.18,2079.16)
U106_19: R125.2 TP103.1 U106.19 U107.1 | length 2457.7
  Top Layer w10: TP103.1 2401.07,2066.73 2458.07,2123.73 U106.19 ; v1(2858.23,2102.27) 3834.48,2102.27 U107.1 v1(3945.47,2071.73)
  Bottom Layer w10: TP103.1 2401.07,2066.73 2436.59,2102.25 v1@2858.21,2102.25 ; v1(3945.47,2071.73) 3945.47,1839.17 4091.66,1692.98 4210.25,1692.98 R125.2
U106_23: R113.1 U106.23 U107.5 | length 2055.1
  Top Layer w10: U106.23 2562.07,2021.73 2667.16,1916.64 ; R113.1 2667.16,1789.89 2667.16,1916.64 ; U107.5 3989,1921.73 3912.25,1998.48 3752.16,1998.48 3664.46,2086.18 3187.38,2086.18 3017.84,1916.64 2667.16,1916.64
U107_2: R124.2 R125.1 U107.2 | length 933.2
  Top Layer w10: U107.2 3890.02,2046.73 4102.11,2046.73 4167.81,1981.03 4524.7,1981.03 R124.2
  Bottom Layer w10: R124.2 4584,1776.73 R125.1
U107_3: R123.2 R126.1 U107.3 | length 1151.1
  Top Layer w10: U107.3 3916.24,1971.73 4271.24,1616.73 R126.1
  Bottom Layer w10: R126.1 4482.08,1804.81 4482.08,1969.81 R123.2
U107_7: R126.2 U107.6 U107.7 | length 737
  Top Layer w10: U107.7 U107.6 4060.79,1964.94 4163.78,1964.94 4511.99,1616.73 R126.2
pads on no net: U103.8 U103.9 U103.10 U103.11 U103.12 U103.13 U104.7 U104.8 U104.9 U104.10 U104.11 U104.12 U104.13 U104.14 U104.15 U106.16 U106.22

## Polygon pours and split planes (outlines as drawn)
GND on Bottom Layer (solid): 1776.09,3790 5266.09,4015 5161.09,1505 1776.09,1505 1776.09,1520
GND on Top Layer (solid): 1776.09,3790 5161.09,3790 5531.09,3785 5161.09,1505 1776.09,1505 1776.09,1575 1776.09,3790

## Silkscreen, mask and mechanical layers (free items; w line width, h text height)
Top Overlay:
  lines w10: 2973.18,3655.77 3843.18,3655.77 3843.18,3758.27 2973.18,3758.27 2973.18,3655.77
  text "/// Analog Board ///" at 3016.09,3662.5 h45
  text "16" at 1995.78,3475 h39.37 r90
  text "Control Board" at 1898.59,2410 h45 r90
  text "1" at 1956.4,1810 h39.37 r270